# EAGLE board Adafruit HMC5883L Compass (EAGLE 6.3)
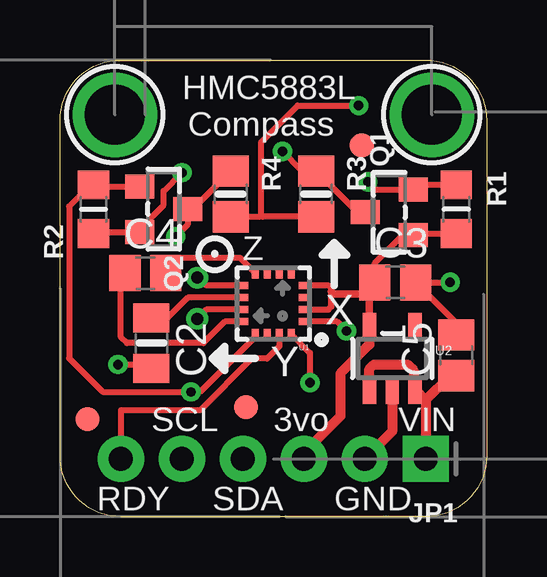
[diagram p0: board, top side]
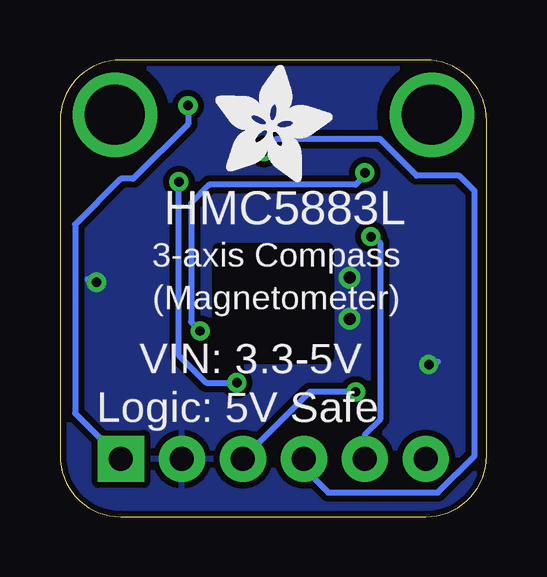
[diagram p1: board, bottom side, seen from below]

Size 17.78 x 19.05 mm. Coordinates in mm from the lower left corner, seen from the top.
Outline: 2.54,19.05 15.24,19.05 arc-90 17.78,16.51 17.78,2.54 arc-90 15.24,0 2.54,0 arc-90 0,2.54 0,16.51 arc-90 2.54,19.05
Copper layers (1*16): Top 0.035mm / dielectric 1.5mm / Bottom 0.035mm
Design rules "adafruit": minimum track width 8mil, minimum drill 15.5mil, track to track 8mil, track to pad 8mil, pad to pad 8mil, via to via 8mil, smd to smd 8mil, copper to edge 10mil, drill to drill 8mil, minimum pad ring 10mil, minimum via ring 8mil, stop-mask expansion 4mil, vias tented up to drill 20mil, thermal gap 10mil
bRestrict: area 6.6,6.6 to 11.2,11.2

## Footprints (pad centres in the part's own frame; a part is rotated, then mirrored left to right if it is on the bottom)
0805_10MGAP = smd 1.2 x 1.5: 1 -1.05,0; 2 1.05,0
C0805 = smd 1.3 x 1.5: 1 -0.85,0; 2 0.85,0
1X06_ROUND_76 = drill 1 pad 1.93 square: 1 -6.35,0 | drill 1 pad 1.93: 2 -3.81,0; 3 -1.27,0; 4 1.27,0; 5 3.81,0; 6 6.35,0
SOT23-WIDE = smd 1 x 1.2: 1 -0.95,-1; 2 0.95,-1; 3 0,1
_0805MP = smd 1.2 x 1.3: 1 -1.016,0; 2 1.016,0
0805-NO = smd 1.3 x 1.5: 1 -0.95,0; 2 0.95,0
HMC5883L = smd 0.45 x 0.3: 1 -1.275,0.75; 2 -1.275,0.25; 3 -1.275,-0.25; 4 -1.275,-0.75; 9 1.275,-0.75; 10 1.275,-0.25; 11 1.275,0.25; 12 1.275,0.75 | smd 0.3 x 0.45: 5 -0.75,-1.275; 6 -0.25,-1.275; 7 0.25,-1.275; 8 0.75,-1.275; 13 0.75,1.275; 14 0.25,1.275; 15 -0.25,1.275; 16 -0.75,1.275
SOT23-5 = smd 0.55 x 1.2: 1 -0.95,-1.3; 2 0,-1.3; 3 0.95,-1.3; 4 0.95,1.3; 5 -0.95,1.3
MOUNTINGHOLE_2.5_PLATED = drill 2.5 pad 3.2: P$1 0,0
FIDUCIAL_1MM = smd 1 x 1: 1 0,0

## Placement (x,y rotation side)
C2  4.7uF  [0805_10MGAP]  3.81,7.24 270 top
C3  10uF  [C0805]  13.97,9.78 0 top
C4  0.22uF  [C0805]  3.56,10.16 0 top
C5  10uF  [C0805]  16.51,6.73 90 top
JP1  [1X06_ROUND_76]  8.89,2.41 180 top
Q1  BSS138  [SOT23-WIDE]  13.72,12.7 90 top
Q2  BSS138  [SOT23-WIDE]  4.32,12.83 270 top
R1  10K  [_0805MP]  16.51,12.83 270 top
R2  10K  [_0805MP]  1.4,12.83 90 top
R3  10K  [0805-NO]  10.67,13.46 270 top
R4  10K  [0805-NO]  7.11,13.46 270 top
U1  HMC5883L-T  [HMC5883L]  8.89,8.89 180 top
U2  MIC5225-3.3V  [SOT23-5]  13.84,6.6 0 top
U$7  [ADAFRUIT_5MM]  11.3,13.97 0 bottom
U$8  MOUNTINGHOLE2.5  [MOUNTINGHOLE_2.5_PLATED]  2.29,16.76 0 top
U$9  MOUNTINGHOLE2.5  [MOUNTINGHOLE_2.5_PLATED]  15.49,16.76 0 top
U$10  FIDUCIAL  [FIDUCIAL_1MM]  1.14,4.06 0 top
U$11  FIDUCIAL  [FIDUCIAL_1MM]  12.57,15.49 0 top
U$12  FIDUCIAL  [FIDUCIAL_1MM]  7.75,4.57 0 top

## Library data of the parts
C2 JP1 Q1 Q2 R1-R4 U1 U2 U$7 = microbuilder
C3-C5 U$10-U$12 = adafruit
U$8 U$9 = microbuilder; BOM: EXCLUDE

## Nets
3.3V: C3.1 JP1.3 Q1.1 Q2.1 R1.2 R2.2 U1.2 U1.4 U1.13 U2.5
DRDY: JP1.6 U1.15
GND: C2.2 C3.2 C5.2 JP1.2 U1.9 U1.11 U2.2
N$1: C4.1 U1.12
N$2: C4.2 U1.8
N$3: C2.1 U1.10
SCL_3.3V: Q2.2 R2.1 U1.1
SCL_5.0V: JP1.5 Q2.3 R4.1
SDA_3.3V: Q1.2 R1.1 U1.16
SDA_5.0V: JP1.4 Q1.3 R3.1
VIN: C5.1 JP1.1 R3.2 R4.2 U2.1 U2.3

## Tracks (layer width: path | path; a pad name or v marks a point on that pad's centre or on a via)
3.3V  (via drill 0.39)
  Top 0.254: U1.2 11.18,8.64 11.3,8.76 11.3,9.4 11.3,9.53 11.19,9.64 U1.4 | R1.2 14.78,11.81 Q1.1 14.65,11.68 14.22,11.68 13.12,10.58 C3.1 12.89,9.55 12.89,9.3 | U1.13 8.14,7.5 5.84,5.21 v5.46,5.21 1.78,5.21 0.38,6.6 0.38,12.95 1.27,13.84 R2.2 1.46,13.78 Q2.1
  Top 0.305: U2.5 12.89,9.3 11.4,9.3 11.3,9.4
  Top 0.406: U2.5 12.89,7.18 11.68,5.97 11.68,4.19 10.16,2.67 JP1.3
  Bottom 0.254: v5.46,5.21 7.37,5.21 JP1.3
DRDY
  Top 0.254: JP1.6 2.54,4.45 5.84,4.45 8,6.6 8.63,6.6 9.14,7.11 U1.15
GND  (via drill 0.39, 0.5)
  Top 0.254: U1.11 6.1,8.64 v5.71,8.26 | v5.71,9.97 5.78,9.97 6.1,9.65 7.6,9.65 U1.9 | C5.2 16.51,8.09 C3.2 v16.26,9.78 | v2.41,6.35 3.65,6.35 C2.2
  Top 0.406: U2.2 13.84,3.56 JP1.2
  Bottom 0.254: v16.26,9.78 16.51,9.78 16.64,9.91 | v2.41,6.35 2.41,6.48 2.03,6.48
  pour Bottom (isolate 0.254): 0,0 0,19.3 18.03,19.43 18.03,0.13
N$1
  Top 0.254: U1.12 6.87,8.14 5.97,7.24 2.79,7.24 2.54,7.49 2.54,9.99 C4.1
N$2
  Top 0.254: U1.8 7.51,10.79 5.08,10.79 4.45,10.16 C4.2
N$3
  Top 0.254: U1.10 5.33,9.14 4.48,8.29 C2.1
SCL_3.3V  (via drill 0.39)
  Top 0.254: v5.08,14.35 4.32,13.59 4.32,13 3.32,12 Q2.2 1.46,11.88 R2.1 | v11.94,7.75 11.54,8.14 U1.1
  Bottom 0.254: v11.94,7.75 12.32,8.13 12.32,13.08 11.56,13.84 5.46,13.84 5.08,14.22 v5.08,14.35
SCL_5.0V  (via drill 0.39)
  Top 0.254: v4.83,11.68 5.32,12.18 Q2.3 5.53,12.83 R4.1
  Bottom 0.254: JP1.5 5.08,3.43 4.45,4.06 4.45,11.43 4.7,11.68 v4.83,11.68
SDA_3.3V  (via drill 0.39)
  Top 0.254: R1.1 14.91,13.84 Q1.2 13.15,13.65 v12.83,13.97 | U1.16 10.41,6.84 v10.41,5.59
  Bottom 0.254: v12.83,13.97 12.83,6.73 11.68,5.59 v10.41,5.59
SDA_5.0V  (via drill 0.39)
  Top 0.254: v9.27,15.24 10.03,14.48 10.6,14.48 R3.1 12.38,12.7 Q1.3
  Bottom 0.254: JP1.4 7.62,2.03 6.6,1.02 2.03,1.02 0.51,2.54 0.51,13.59 1.14,14.22 2.92,14.22 4.45,15.75 8.76,15.75 v9.27,15.24
VIN  (via drill 0.39)
  Top 0.254: 8.38,12.57 8.38,15.62 9.91,17.14 v12.45,17.14 | R4.2 8.32,12.51 8.38,12.57 | R3.2 8.44,12.51 8.38,12.57
  Top 0.406: 15.24,4.86 U2.3 14.73,5.37 14.73,6.1 14.48,6.35 13.08,6.35 12.89,6.16 U2.1 | 15.24,4.86 JP1.1 | 16.3,5.88 16.26,5.84 | 15.24,4.86 15.24,4.87 16.26,5.88 16.3,5.88 | 16.3,5.88 C5.1
  Bottom 0.254: v12.45,17.14 12.45,16.38 14.73,14.1 15.24,14.1 17.14,12.19 17.14,4.32 JP1.1

## Text on the board
tPlace: HMC5883L | Compass | Z | X | Y | VIN | SCL | 3vo | RDY | SDA | GND
bPlace: HMC5883L | 3-axis Compass | (Magnetometer) | VIN: 3.3-5V | Logic: 5V Safe